# EAGLE board PCB_bun (EAGLE 9.7.0)
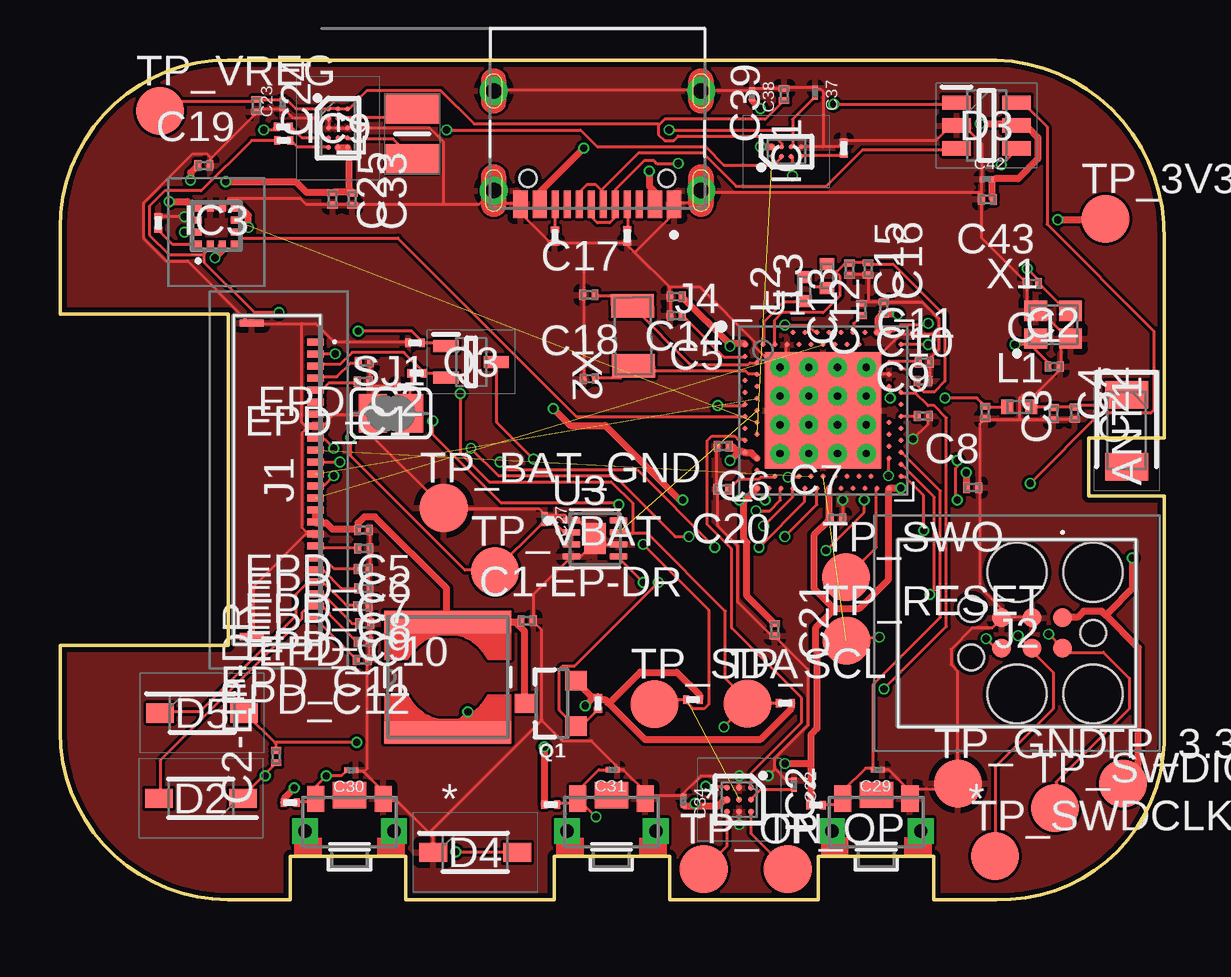
[diagram p0: board, top side]
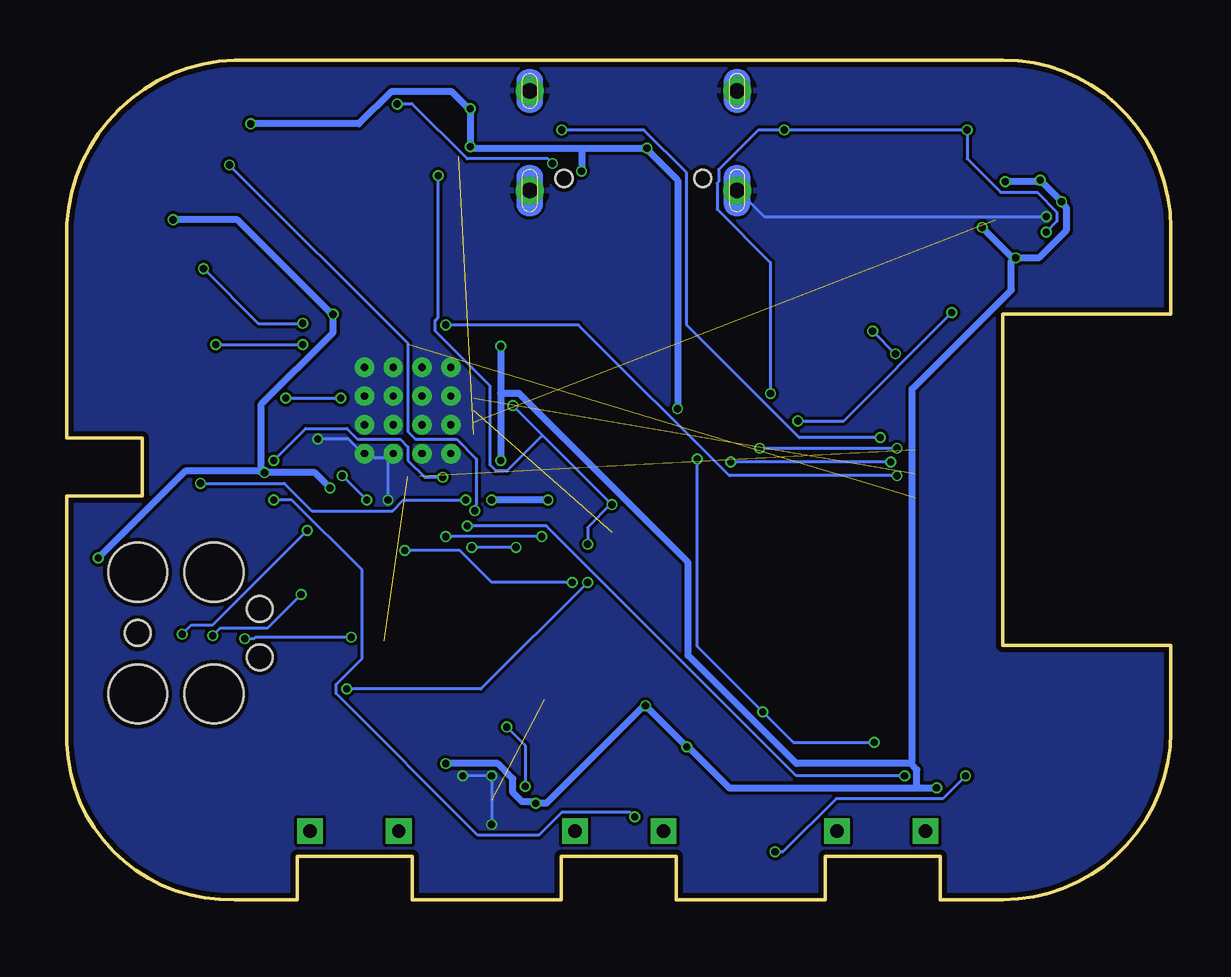
[diagram p1: board, bottom side, seen from below]

Size 46 x 35 mm. Coordinates in mm from the lower left corner, seen from the top.
Outline: 39,0 36.4,0 36.4,1.8 31.6,1.8 31.6,0 25.4,0 25.4,1.8 20.6,1.8 20.6,0 14.4,0 14.4,1.8 9.6,1.8 9.6,0 7,0 arc-90 0,7 0,10.6 7,10.6 7,24.4 0,24.4 0,28 arc-90 7,35 39,35 arc-90 46,27.5 46,19.25 42.86,19.25 42.86,16.82 46,16.82 46,6.5 arc-90 39,0
Copper layers (1*16): Top 0.035mm / dielectric 1.6mm / Bottom 0.035mm
Design rules "jlcpcb-2layers.dru": minimum track width 5mil, minimum drill 0.3mm, track to track 5mil, track to pad 5mil, pad to pad 5mil, via to via 5mil, smd to smd 5mil, copper to edge 0.2mm, drill to drill 6mil, minimum pad ring 10mil, minimum via ring 3mil, stop-mask expansion 4mil, vias tented up to drill 0mil, thermal gap 10mil
Net classes: 1 trasee_putere: width 0.3 mm

## Footprints (pad centres in the part's own frame; a part is rotated, then mirrored left to right if it is on the bottom)
2450AT18B100E_ANTC3216X140N = smd 1.15 x 1.8: 1 -1.5,0; 2 1.5,0
NORDIC_NRF_3_RESC0201_L = smd 0.28 x 0.43: 1 -0.255,0; 2 0.255,0
GRM011R60J152KE01L_2_CAPC0201X13N = smd 0.22 x 0.23: 1 -0.185,0; 2 0.185,0
ESP32_C6_LIBRARY_5_SOD3716X135N = smd 1.15 x 0.8: 1 -1.75,0; 2 1.75,0
ESP32_C6_LIBRARY_3_SOT95P280X145-6N = smd 1.2 x 0.6: 1 -1.25,0.95; 2 -1.25,0; 3 -1.25,-0.95; 4 1.25,-0.95; 5 1.25,0; 6 1.25,0.95
BQ25180YBGR_BGA8C40P2X4_100X155X50 = smd 0.2 x 0.2: A1 -0.2,0.6; A2 0.2,0.6; B1 -0.2,0.2; B2 0.2,0.2; C1 -0.2,-0.2; C2 0.2,-0.2; D1 -0.2,-0.6; D2 0.2,-0.6
DRV2605YZFR_BGA9C50P3X3_144X144X62 = smd 0.25 x 0.25: A1 -0.5,0.5; A2 0,0.5; A3 0.5,0.5; B1 -0.5,0; B2 0,0; B3 0.5,0; C1 -0.5,-0.5; C2 0,-0.5; C3 0.5,-0.5
BMA423_BMA423 = smd 0.3 x 0.35: 1 -0.75,-0.775; 2 -0.25,-0.775; 3 0.25,-0.775; 4 0.75,-0.775; 7 0.75,0.775; 8 0.25,0.775; 9 -0.25,0.775; 10 -0.75,0.775 | smd 0.35 x 0.3: 5 0.775,-0.25; 6 0.775,0.25; 11 -0.775,0.25; 12 -0.775,-0.25
RT6160AWSC_BGA15C40P3X5_140X230X60 = smd 0.216 x 0.216: A1 -0.4,0.8; A2 0,0.8; A3 0.4,0.8; B1 -0.4,0.4; B2 0,0.4; B3 0.4,0.4; C1 -0.4,0; C2 0,0; C3 0.4,0; D1 -0.4,-0.4; D2 0,-0.4; D3 0.4,-0.4; E1 -0.4,-0.8; E2 0,-0.8; E3 0.4,-0.8
503480-2400_5034802400 = smd 0.3 x 0.7: 1 -5.75,1.525; 2 -5.25,1.525; 3 -4.75,1.525; 4 -4.25,1.525; 5 -3.75,1.525; 6 -3.25,1.525; 7 -2.75,1.525; 8 -2.25,1.525; 9 -1.75,1.525; 10 -1.25,1.525; 11 -0.75,1.525; 12 -0.25,1.525; 13 0.25,1.525; 14 0.75,1.525; 15 1.25,1.525; 16 1.75,1.525; 17 2.25,1.525; 18 2.75,1.525; 19 3.25,1.525; 20 3.75,1.525; 21 4.25,1.525; 22 4.75,1.525; 23 5.25,1.525; 24 5.75,1.525 | smd 0.3 x 1: MP1 -6.54,-1.125; MP2 6.54,-1.125
TC2030-IDC_TC2030IDC = smd 0.783 x 0.783: 1 -0.953,-0.635; 2 -0.953,0.635; 3 0.317,-0.635; 4 0.317,0.635; 5 1.588,-0.635; 6 1.588,0.635 | hole 2.451: -2.223,-2.54; -2.223,2.54; 0.952,-2.54; 0.952,2.54 | hole 1.067: -2.223,0; 2.857,-1.016; 2.857,1.016
KH-TYPE-C-16P_KINGHELM_KH-TYPE-C-16P = smd 0.6 x 1.15: A1_B12 -3.2,4.725; A4_B9 -2.4,4.725; A9_B4 2.4,4.725; A12_B1 3.2,4.725 | smd 0.3 x 1.15: A5 -1.25,4.725; A6 -0.25,4.725; A7 0.25,4.725; A8 1.25,4.725; B5 1.75,4.725; B6 0.75,4.725; B7 -0.75,4.725; B8 -1.75,4.725 | drill 0.65 pad 1.05: SH1 -4.32,0; SH2 4.32,0; SH3 -4.32,4.15; SH4 4.32,4.15 | hole 0.7: -2.89,3.65; 2.89,3.65
NORDIC_NRF_2_RESC0402_L = smd 0.5 x 0.6: 1 -0.5,0; 2 0.5,0
ESP32_C6_LIBRARY_2_IND_4828-WE-TPC_WRE = smd 0.9 x 5.3: 1 -2.286,0; 2 2.286,0
MLP2016SR47MT0S1_INDC2016X100N = smd 1.2 x 2.2: 1 -1.028,0; 2 1.028,0
ESP32_C6_LIBRARY_4_ESP32_C6_LIBRARY_4_ESP32_C6_LIBRARY_4_ESP32_C6_LIBRARY_4_ESP32_WROVER_SPARKFUN-DISCRETESEMI_SOT23-3 = smd 0.8 x 0.9: 1 -0.95,-1; 2 0.95,-1; 3 0,1.1
ESP32_C6_LIBRARY_6_SOT65P210X110-3N = smd 1.05 x 0.5: 1 -1.05,0.65; 2 -1.05,-0.65; 3 1.05,0
CPF0201D7K68C1_0201 = smd 0.35 x 0.25: 1 0,0.275; 2 0,-0.275
ERA-1AEB3401C_0201 = smd 0.35 x 0.25: 1 0,0.275; 2 0,-0.275
ESP32_C6_LIBRARY_7_JUMPER_SJ = smd 1.168 x 1.6: 1 -0.762,0; 2 0.762,0
2025-10-22_07-23-44_LIBRARY_SW_EVP-AKE31A_PAN = smd 0.711 x 1.092: 1 -1.4,-0.972; 2 1.4,-0.972 | drill 0.559 pad 0.914 square: 3 -1.848,0.381; 4 1.848,0.381 | smd 1.397 x 1.092: 5 0,-1.124
HECTOR_WATCH_1_TP20R = smd 2 x 2: TP 0,0
NORDIC_NRF_4_AQFN50P700X700X85_HS-74N = smd 4.85 x 4.85: P$74 0,0 | drill 0.3 pad 0.6: P$75 -1.8,1.8; P$76 -0.6,1.8; P$77 0.6,1.8; P$78 1.8,1.8; P$79 -1.8,0.6; P$80 -0.6,0.6; P$81 0.6,0.6; P$82 1.8,0.6; P$83 -1.8,-0.6; P$84 -0.6,-0.6; P$85 0.6,-0.6; P$86 1.8,-0.6; P$87 -1.8,-1.8; P$88 -0.6,-1.8; P$89 0.6,-1.8; P$90 1.8,-1.8 | smd 0.2 x 0.2: P$A8 -1.25,3.25; P$A10 -0.75,3.25; P$A12 -0.25,3.25; P$A14 0.25,3.25; P$A16 0.75,3.25; P$A18 1.25,3.25; P$A20 1.75,3.25; P$A22 2.25,3.25; P$A23 2.75,3.25; P$AA24 3.25,-2.25; P$AB2 -2.75,-2.5; P$AC5 -2,-2.75; P$AC9 -1,-2.75; P$AC11 -0.5,-2.75; P$AC13 0,-2.75; P$AC15 0.5,-2.75; P$AC17 1,-2.75; P$AC19 1.5,-2.75; P$AC21 2,-2.75; P$AC24 3.25,-2.75; P$AD2 -2.75,-3.25; P$AD4 -2.25,-3.25; P$AD6 -1.75,-3.25; P$AD8 -1.25,-3.25; P$AD10 -0.75,-3.25; P$AD12 -0.25,-3.25; P$AD14 0.25,-3.25; P$AD16 0.75,-3.25; P$AD18 1.25,-3.25; P$AD20 1.75,-3.25; P$AD22 2.25,-3.25; P$AD23 2.75,-3.25; P$B1 -3.25,2.75; P$B3 -2.5,2.75; P$B5 -2,2.75; P$B7 -1.5,2.75; P$B9 -1,2.75; P$B11 -0.5,2.75; P$B13 0,2.75; P$B15 0.5,2.75; P$B17 1,2.75; P$B19 1.5,2.75; P$B24 3.25,2.75; P$C1 -3.25,2.25; P$D2 -2.75,2; P$D23 2.75,2; P$E24 3.25,1.75; P$F2 -2.75,1.5; P$F23 2.75,1.5; P$G1 -3.25,1.25; P$H2 -2.75,1; P$H23 2.75,1; P$J1 -3.25,0.75; P$J24 3.25,0.75; P$K2 -2.75,0.5; P$L1 -3.25,0.25; P$L24 3.25,0.25; P$M2 -2.75,0; P$N1 -3.25,-0.25; P$N24 3.25,-0.25; P$P2 -2.75,-0.5; P$P23 2.75,-0.5; P$R1 -3.25,-0.75; P$R24 3.25,-0.75; P$T2 -2.75,-1; P$T23 2.75,-1; P$U1 -3.25,-1.25; P$U24 3.25,-1.25; P$V23 2.75,-1.5; P$W1 -3.25,-1.75; P$W24 3.25,-1.75; P$Y2 -2.75,-2; P$Y23 2.75,-2
ESP32_C6_LIBRARY_SON50P200X200X80-9N = smd 0.76 x 0.27: 1 -0.985,0.75; 2 -0.985,0.25; 3 -0.985,-0.25; 4 -0.985,-0.75; 5 0.985,-0.75; 6 0.985,-0.25; 7 0.985,0.25; 8 0.985,0.75 | smd 0.9 x 1.3: 9 0,0
NORDIC_NRF_BT-XTAL_2016_N = smd 0.95 x 0.85: 1 -0.725,-0.575; 2 0.725,-0.575; 3 0.725,0.575; 4 -0.725,0.575
NORDIC_NRF_1_XTAL_3215_N = smd 1 x 1.8: 1 -1.25,0; 2 1.25,0

## Placement (x,y rotation side)
ANT1  2450AT18B100E  [2450AT18B100E_ANTC3216X140N]  44.44,19.55 270 top
C1  12pF  [NORDIC_NRF_3_RESC0201_L]  41.42,22.22 0 top
C1-EP-DR  10uF  [NORDIC_NRF_3_RESC0201_L]  19.46,11.62 0 top
C2  12pF  [NORDIC_NRF_3_RESC0201_L]  40.52,25.68 180 top
C2-EP-DR  4.7uF/25V  [NORDIC_NRF_3_RESC0201_L]  9.01,5.97 90 top
C3  1pF  [NORDIC_NRF_3_RESC0201_L]  38.55,20.31 270 top
C4  1pF  [NORDIC_NRF_3_RESC0201_L]  41.39,20.25 270 top
C5  100nF  [NORDIC_NRF_3_RESC0201_L]  25.67,24.35 180 top
C6  4.7µF  [NORDIC_NRF_3_RESC0201_L]  27.63,18.9 180 top
C7  100nF  [NORDIC_NRF_3_RESC0201_L]  32.36,15.88 0 top
C8  100nF  [NORDIC_NRF_3_RESC0201_L]  38.02,17.17 0 top
C9  820pF  [NORDIC_NRF_3_RESC0201_L]  35.98,20.16 0 top
C10  N.C.  [NORDIC_NRF_3_RESC0201_L]  35.96,21.61 0 top
C11  100pF  [NORDIC_NRF_3_RESC0201_L]  36.02,22.4 0 top
C12  100nF  [NORDIC_NRF_3_RESC0201_L]  34.32,24.66 90 top
C13  N.C.  [NORDIC_NRF_3_RESC0201_L]  33.4,24.6 90 top
C14  4.7µF  [NORDIC_NRF_3_RESC0201_L]  25.67,25.13 179.2 top
C15  1.0µF  [NORDIC_NRF_3_RESC0201_L]  32.9,26.27 270 top
C16  47nF  [NORDIC_NRF_3_RESC0201_L]  33.67,26.29 270 top
C17  12pF  [NORDIC_NRF_3_RESC0201_L]  22.04,25.21 0 top
C18  12pF  [NORDIC_NRF_3_RESC0201_L]  22.05,21.71 1.3 top
C19  100nF  [NORDIC_NRF_3_RESC0201_L]  6,30.6 0 top
C20  4.7µF  [NORDIC_NRF_3_RESC0201_L]  27.61,17.11 180 top
C21  4.7µF  [NORDIC_NRF_3_RESC0201_L]  29.78,11.25 270 top
C22  N.C.  [NORDIC_NRF_3_RESC0201_L]  42.28,20.28 270 top
C23  0.1uF  [GRM011R60J152KE01L_2_CAPC0201X13N]  9.27,33.16 90 top
C24  10uF  [NORDIC_NRF_3_RESC0201_L]  8.19,33.09 270 top
C25  22uF  [NORDIC_NRF_3_RESC0201_L]  11.36,29.2 270 top
C27  0.1uF  [GRM011R60J152KE01L_2_CAPC0201X13N]  20.2,15.87 270 top
C29  1uF  [GRM011R60J152KE01L_2_CAPC0201X13N]  34.08,5.42 180 top
C30  1uF  [GRM011R60J152KE01L_2_CAPC0201X13N]  12.14,5.4 180 top
C31  1uF  [GRM011R60J152KE01L_2_CAPC0201X13N]  23.02,5.42 180 top
C32  1uF  [GRM011R60J152KE01L_2_CAPC0201X13N]  30.59,4.79 270 top
C33  22uF  [NORDIC_NRF_3_RESC0201_L]  12.18,29.2 270 top
C34  0.1uF  [GRM011R60J152KE01L_2_CAPC0201X13N]  25.98,4.11 270 top
C37  1uF  [GRM011R60J152KE01L_2_CAPC0201X13N]  31.47,33.63 270 top
C38  1uF  [GRM011R60J152KE01L_2_CAPC0201X13N]  28.84,33.57 270 top
C39  10uF  [NORDIC_NRF_3_RESC0201_L]  30.17,33.56 90 top
C42  0.1uF  [GRM011R60J152KE01L_2_CAPC0201X13N]  38.62,30.03 0 top
C43  4.7uF  [NORDIC_NRF_3_RESC0201_L]  38.64,29.19 180 top
D2  MBR0530  [ESP32_C6_LIBRARY_5_SOD3716X135N]  5.87,4.22 180 top
D3  USBLC6-2SC6Y  [ESP32_C6_LIBRARY_3_SOT95P280X145-6N]  38.61,32.27 0 top
D4  MBR0530  [ESP32_C6_LIBRARY_5_SOD3716X135N]  17.3,1.97 0 top
D5  MBR0530  [ESP32_C6_LIBRARY_5_SOD3716X135N]  5.92,7.77 0 top
EPD_C1  1uF/50V  [NORDIC_NRF_3_RESC0201_L]  12.64,21.59 180 top
EPD_C2  1uF/50V  [NORDIC_NRF_3_RESC0201_L]  12.68,22.41 180 top
EPD_C5  0.1uF/50V  [NORDIC_NRF_3_RESC0201_L]  12.64,15.4 180 top
EPD_C6  1uF/50V  [NORDIC_NRF_3_RESC0201_L]  12.66,14.63 180 top
EPD_C7  1uF/50V  [NORDIC_NRF_3_RESC0201_L]  12.63,13.78 180 top
EPD_C8  1uF/50V  [NORDIC_NRF_3_RESC0201_L]  12.66,12.97 180 top
EPD_C9  1uF/50V  [NORDIC_NRF_3_RESC0201_L]  12.62,12.22 180 top
EPD_C10  1uF/50V  [NORDIC_NRF_3_RESC0201_L]  12.7,11.49 180 top
EPD_C11  1uF/50V  [NORDIC_NRF_3_RESC0201_L]  12.63,10.74 180 top
EPD_C12  1uF/50V  [NORDIC_NRF_3_RESC0201_L]  12.6,9.99 180 top
IC1  BQ25180YBGR  [BQ25180YBGR_BGA8C40P2X4_100X155X50]  30.27,31.17 90 top
IC2  DRV2605YZFR  [DRV2605YZFR_BGA9C50P3X3_144X144X62]  28.3,4.16 270 top
IC3  BMA421  [BMA423_BMA423]  6.51,28.08 0 top
IC9  RT6160AWSC  [RT6160AWSC_BGA15C40P3X5_140X230X60]  11.58,32.16 0 top
J1  503480-2400  [503480-2400_5034802400]  9.12,17.5 270 top
J2  TC2030-IDC  [TC2030-IDC_TC2030IDC]  40.82,11.11 180 top
J4  KH-TYPE-C-16P  [KH-TYPE-C-16P_KINGHELM_KH-TYPE-C-16P]  22.39,33.71 180 top
L1  3.9nH  [NORDIC_NRF_2_RESC0402_L]  39.98,20.53 0 top
L2  10µH  [NORDIC_NRF_2_RESC0402_L]  31.02,25.45 90 top
L3  15nH  [NORDIC_NRF_2_RESC0402_L]  31.96,26 90 top
L5  68uH  [ESP32_C6_LIBRARY_2_IND_4828-WE-TPC_WRE]  16.16,9.27 90 top
L7  FTC252012SR47MBCA  [MLP2016SR47MT0S1_INDC2016X100N]  14.67,31.91 270 top
Q1  20V/4.2A/52mΩ/1.4W  [ESP32_C6_LIBRARY_4_ESP32_C6_LIBRARY_4_ESP32_C6_LIBRARY_4_ESP32_C6_LIBRARY_4_ESP32_WROVER_SPARKFUN-DISCRETESEMI_SOT23-3]  20.5,8.18 90 top
Q3  SI1308EDL-T1-GE3  [ESP32_C6_LIBRARY_6_SOT65P210X110-3N]  17.13,22.41 0 top
R1  10k  [CPF0201D7K68C1_0201]  9.59,4.04 270 top
R1_EP_DR  0.47  [ERA-1AEB3401C_0201]  14.87,21.95 90 top
R1_USB  5K1  [CPF0201D7K68C1_0201]  23.64,27.67 180 top
R2  0  [CPF0201D7K68C1_0201]  9.32,31.64 90 top
R2_EP_DR  10k  [ERA-1AEB3401C_0201]  14.79,23.21 90 top
R2_USB  5K1  [ERA-1AEB3401C_0201]  20.62,27.66 0 top
R3  0  [CPF0201D7K68C1_0201]  4.1,28.21 0 top
R4  0  [CPF0201D7K68C1_0201]  9.3,32.21 90 top
R7  10k  [CPF0201D7K68C1_0201]  31.5,3.94 270 top
R8  10k  [CPF0201D7K68C1_0201]  20.44,3.96 270 top
R9  10k  [CPF0201D7K68C1_0201]  32.66,31.32 0 top
R17  3K3  [CPF0201D7K68C1_0201]  30.22,8.19 270 top
R18  3K3  [CPF0201D7K68C1_0201]  26.37,8.34 270 top
R_PWR_EPD  10k  [CPF0201D7K68C1_0201]  22.42,8.17 180 top
R_TYPE_SEL  2.2  [ERA-1AEB3401C_0201]  14.34,21.38 90 top
SJ1  [ESP32_C6_LIBRARY_7_JUMPER_SJ]  13.79,20.27 0 top
SW_DN  2025-10-22_07-23-44_LIBRARY_EVP-AKE31ASW_EVP-AKE31A_PAN  [2025-10-22_07-23-44_LIBRARY_SW_EVP-AKE31A_PAN]  34.02,3.24 180 top
SW_ENT  2025-10-22_07-23-44_LIBRARY_EVP-AKE31ASW_EVP-AKE31A_PAN  [2025-10-22_07-23-44_LIBRARY_SW_EVP-AKE31A_PAN]  22.98,3.23 180 top
SW_UP  2025-10-22_07-23-44_LIBRARY_EVP-AKE31ASW_EVP-AKE31A_PAN  [2025-10-22_07-23-44_LIBRARY_SW_EVP-AKE31A_PAN]  12.06,3.23 180 top
TP_3.3V  HECTOR_WATCH_1_TPTP20R  [HECTOR_WATCH_1_TP20R]  44.28,4.83 0 top
TP_3V3  HECTOR_WATCH_1_TPTP20R  [HECTOR_WATCH_1_TP20R]  43.55,28.38 0 top
TP_BAT_GND  HECTOR_WATCH_1_TPTP20R  [HECTOR_WATCH_1_TP20R]  15.99,16.32 0 top
TP_GND  HECTOR_WATCH_1_TPTP20R  [HECTOR_WATCH_1_TP20R]  37.41,4.84 0 top
TP_ON  HECTOR_WATCH_1_TPTP20R  [HECTOR_WATCH_1_TP20R]  26.82,1.28 0 top
TP_OP  HECTOR_WATCH_1_TPTP20R  [HECTOR_WATCH_1_TP20R]  30.32,1.28 0 top
TP_RESET  HECTOR_WATCH_1_TPTP20R  [HECTOR_WATCH_1_TP20R]  32.77,10.78 0 top
TP_SCL  HECTOR_WATCH_1_TPTP20R  [HECTOR_WATCH_1_TP20R]  28.65,8.16 0 top
TP_SDA  HECTOR_WATCH_1_TPTP20R  [HECTOR_WATCH_1_TP20R]  24.78,8.15 0 top
TP_SWDCLK  HECTOR_WATCH_1_TPTP20R  [HECTOR_WATCH_1_TP20R]  38.95,1.82 0 top
TP_SWDIO  HECTOR_WATCH_1_TPTP20R  [HECTOR_WATCH_1_TP20R]  41.46,3.82 0 top
TP_SWO  HECTOR_WATCH_1_TPTP20R  [HECTOR_WATCH_1_TP20R]  32.75,13.44 0 top
TP_VBAT  HECTOR_WATCH_1_TPTP20R  [HECTOR_WATCH_1_TP20R]  18.12,13.69 0 top
TP_VREG  HECTOR_WATCH_1_TPTP20R  [HECTOR_WATCH_1_TP20R]  4.17,32.88 0 top
U1  NRF52840_QF  [NORDIC_NRF_4_AQFN50P700X700X85_HS-74N]  31.8,20.39 0 top
U3  MAX17048G+T10  [ESP32_C6_LIBRARY_SON50P200X200X80-9N]  22.29,15.05 0 top
X1  32MHz  [NORDIC_NRF_BT-XTAL_2016_N]  41.38,23.96 0 top
X2  32.768kHz  [NORDIC_NRF_1_XTAL_3215_N]  23.87,23.49 90.9 top

## Library data of the parts
ANT1 = InkTime_v5; ARROW_PART_NUMBER: 2450AT18B100E; ARROW_PRICE-STOCK: https://www.arrow.com/en/products/2450at18b100e/johanson-dielectrics?utm_currency=USD&region=nac; DESCRIPTION: Antennas 2.45GHz ANTENNA; HEIGHT: 1.4mm; MANUFACTURER_NAME: JOHANSON TECHNOLOGY; MANUFACTURER_PART_NUMBER: 2450AT18B100E; MOUSER_PART_NUMBER: 609-2450AT18B100E; MOUSER_PRICE-STOCK: https://www.mouser.co.uk/ProductDetail/Johanson-Technology/2450AT18B100E?qs=yCnrNFeXz%252Bh5MFsFIXGZGA%3D%3D
C1 C1-EP-DR C2 C2-EP-DR C3-C22 C24 C25 C33 C39 C43 EPD_C1 EPD_C2 EPD_C5-EPD_C12 L1-L3 R1 R1_EP_DR R1_USB R2 R2_EP_DR R2_USB R3 R4 R7-R9 R17 R18 R_PWR_EPD R_TYPE_SEL SJ1 TP_3.3V TP_3V3 TP_BAT_GND TP_GND TP_ON TP_OP TP_RESET TP_SCL TP_SDA TP_SWDCLK TP_SWDIO TP_SWO TP_VBAT TP_VREG U1 X1 X2 = InkTime_v5
C23 C27 C29-C32 C34 C37 C38 C42 = InkTime_v5; AVAILABILITY: In Stock; CHECK_PRICES: https://www.snapeda.com/parts/GRM011R60J152KE01L/Murata/view-part/?ref=eda; DESCRIPTION: SMD Capacitor X5R(EIA) with Capacitance: 1500pF Tol. 10%. Rated Voltage: 6.3Vdc; MF: Murata; MP: GRM011R60J152KE01L; PACKAGE: 0201 Murata; PRICE: None; SNAPEDA_LINK: https://www.snapeda.com/parts/GRM011R60J152KE01L/Murata/view-part/?ref=snap
D2 D4 D5 = InkTime_v5; AVAILABILITY: In Stock; CHECK_PRICES: https://www.snapeda.com/parts/MBR0530/Onsemi/view-part/?ref=eda; DESCRIPTION: Diode Schottky 30 V 500mA Surface Mount SOD-123; MF: ON Semiconductor; MP: MBR0530; PACKAGE: SOD-123-2 ON Semiconductor; PRICE: None; PURCHASE-URL: https://www.snapeda.com/api/url_track_click_mouser/?unipart_id=179458&manufacturer=ON Semiconductor&part_name=MBR0530&search_term=None; SNAPEDA_LINK: https://www.snapeda.com/parts/MBR0530/Onsemi/view-part/?ref=snap
D3 = InkTime_v5; AVAILABILITY: In Stock; CHECK_PRICES: https://www.snapeda.com/parts/USBLC6-2SC6Y/STMicroelectronics/view-part/?ref=eda; DESCRIPTION: 17V Clamp 5A (8/20µs) Ipp Tvs Diode Surface Mount SOT-23-6; MF: STMicroelectronics; MP: USBLC6-2SC6Y; PACKAGE: SOT-23-6 STMicroelectronics; PRICE: None; SNAPEDA_LINK: https://www.snapeda.com/parts/USBLC6-2SC6Y/STMicroelectronics/view-part/?ref=snap
IC1 = InkTime_v5; ARROW_PART_NUMBER: BQ25180YBGR; ARROW_PRICE-STOCK: https://www.arrow.com/en/products/bq25180ybgr/texas-instruments?utm_currency=USD&region=nac; DESCRIPTION: Charger IC Lithium Ion/Polymer, Lithium Iron Phosphate 8-DSBGA (1.6x1.1); HEIGHT: 0.5mm; MANUFACTURER_NAME: Texas Instruments; MANUFACTURER_PART_NUMBER: BQ25180YBGR; MOUSER_PART_NUMBER: 595-BQ25180YBGR; MOUSER_PRICE-STOCK: https://www.mouser.co.uk/ProductDetail/Texas-Instruments/BQ25180YBGR?qs=doiCPypUmgEWjAK%252BJAX6Tw%3D%3D
IC2 = InkTime_v5; ARROW_PART_NUMBER: DRV2605YZFR; ARROW_PRICE-STOCK: https://www.arrow.com/en/products/drv2605yzfr/texas-instruments?region=nac; DESCRIPTION: Haptic Driver for ERM/LRA with Built-In Library and Smart Loop Architecture; HEIGHT: 0.625mm; MANUFACTURER_NAME: Texas Instruments; MANUFACTURER_PART_NUMBER: DRV2605YZFR
IC3 = InkTime_v5; ARROW_PART_NUMBER: BMA423; ARROW_PRICE-STOCK: https://www.arrow.com/en/products/bma423/bosch; DESCRIPTION: Accelerometers Triaxial low-g 12bit Acceleration Sensor; HEIGHT: 1mm; MANUFACTURER_NAME: BOSCH; MANUFACTURER_PART_NUMBER: BMA423; MOUSER_PART_NUMBER: 262-BMA423; MOUSER_PRICE-STOCK: https://www.mouser.co.uk/ProductDetail/Bosch-Sensortec/BMA423?qs=HXFqYaX1Q2xC%252BSgeGoX3mg%3D%3D
IC9 = InkTime_v5; DESCRIPTION: Buck-Boost Regulator Positive Output Step-Up/Step-Down I2C DC-DC Controller IC 15-WL-CSP (BSC) (1.4x2.3); HEIGHT: 0.6mm; MANUFACTURER_NAME: RICHTEK; MANUFACTURER_PART_NUMBER: RT6160AWSC; MOUSER_PART_NUMBER: 835-RT6160AWSC; MOUSER_PRICE-STOCK: https://www.mouser.co.uk/ProductDetail/Richtek/RT6160AWSC?qs=amGC7iS6iy%2FLd9PSoixZXQ%3D%3D
J1 = InkTime_v5; DESCRIPTION: FFC & FPC Connectors 0.5mm FPC RA SMT Dual Contact 24Ckt; HEIGHT: 1.87mm; MANUFACTURER_NAME: Molex; MANUFACTURER_PART_NUMBER: 503480-2400; MOUSER_PART_NUMBER: 538-503480-2400; MOUSER_PRICE-STOCK: https://www.mouser.co.uk/ProductDetail/Molex/503480-2400?qs=OAhjpuo3Vu7efIoxFh9AOw%3D%3D
J2 = InkTime_v5; DESCRIPTION: CABLE ADAPTER 6 POS; HEIGHT: 19mm; MANUFACTURER_NAME: Tag Connect; MANUFACTURER_PART_NUMBER: TC2030-IDC
J4 = InkTime_v5; AVAILABILITY: Not in stock; CHECK_PRICES: https://www.snapeda.com/parts/KH-TYPE-C-16P/Kinghelm/view-part/?ref=eda; MF: kinghelm; MP: KH-TYPE-C-16P; PACKAGE: None; PRICE: None; SNAPEDA_LINK: https://www.snapeda.com/parts/KH-TYPE-C-16P/Kinghelm/view-part/?ref=snap
L5 = InkTime_v5; COPYRIGHT: Copyright (C) 2024 Ultra Librarian. All rights reserved.; MANUFACTURER_PART_NUMBER: 744043680; MFR_NAME: Wurth Electronics
L7 = InkTime_v5; DESCRIPTION: SMD / SMT Inductors (Coils), L=0.47?H, L x W x T :; HEIGHT: 1mm; JLCPCB: https://jlcpcb.com/partdetail/6763488-FTC252012SR47MBCA/C5832368; MANUFACTURER_NAME: TDK; MANUFACTURER_PART_NUMBER: FTC252012SR47MBCA
Q1 = InkTime_v5; PROD_ID: TRAN-14388
Q3 = InkTime_v5; AVAILABILITY: In Stock; CHECK_PRICES: https://www.snapeda.com/parts/SI1308EDL-T1-GE3/Vishay+Siliconix/view-part/?ref=eda; DESCRIPTION: Si1308EDL-T1-GE3 N-channel MOSFET Transistor, 1.5 A, 30 V, 3-Pin SC-70 | Siliconix / Vishay SI1308EDL-T1-GE3; MF: Vishay Siliconix; MP: SI1308EDL-T1-GE3; PACKAGE: SOT-323 Vishay Semiconductor; PRICE: None; PURCHASE-URL: https://www.snapeda.com/api/url_track_click_mouser/?unipart_id=274603&manufacturer=Vishay Siliconix&part_name=SI1308EDL-T1-GE3&search_term=None; SNAPEDA_LINK: https://www.snapeda.com/parts/SI1308EDL-T1-GE3/Vishay+Siliconix/view-part/?ref=snap
SW_DN SW_ENT SW_UP = InkTime_v5; COPYRIGHT: Copyright (C) 2025 Ultra Librarian. All rights reserved.; DIGI-KEY_PART_NUMBER_1: P123437TR-ND; DIGI-KEY_PART_NUMBER_2: P123437CT-ND; DIGI-KEY_PART_NUMBER_3: P123437DKR-ND; MANUFACTURER_NAME: Panasonic; MANUFACTURER_PART_NUMBER: EVP-AKE31A
U3 = InkTime_v5; AVAILABILITY: In Stock; CHECK_PRICES: https://www.snapeda.com/parts/MAX17048G+T10/Analog+Devices/view-part/?ref=eda; DESCRIPTION: 3µA 1-Cell/2-Cell Fuel Gauge with ModelGauge; MF: Analog Devices; MP: MAX17048G+T10; PACKAGE: TDFN-8 Maxim; PRICE: None; PURCHASE-URL: https://www.snapeda.com/api/url_track_click_mouser/?unipart_id=329239&manufacturer=Analog Devices&part_name=MAX17048G+T10&search_term=None; SNAPEDA_LINK: https://www.snapeda.com/parts/MAX17048G+T10/Analog+Devices/view-part/?ref=snap

## Nets
3V3 [trasee_putere]: C6.1 C7.1 C8.1 C12.1 C14.1 C19.1 C25.1 C33.1 C34.2 IC2.C2 IC3.3 IC3.7 IC3.10 IC9.E2 IC9.E3 J2.1 Q1.2 R1.2 R7.2 R8.2 R17.1 R18.1 R_PWR_EPD.2 TP_3.3V.TP TP_3V3.TP U1.P$A22 U1.P$AD14 U1.P$AD23 U1.P$B1 U1.P$W1 U1.P$Y2
ALERT: U1.P$J24 U3.5
D+: D3.4 U1.P$AD6
D-: D3.6 U1.P$AD4
DEC1: C5.1 U1.P$C1
DEC3: C11.1 U1.P$D23
DEC4_6: C10.1 C15.1 C16.1 L3.2 U1.P$B5 U1.P$E24
DN: D3.1 J4.A7 J4.B7
DP: D3.3 J4.A6 J4.B6
EPD_3V3 [trasee_putere]: C1-EP-DR.1 EPD_C5.2 J1.15 J1.16 L5.2 Q1.3
EPD_BUSY: J1.9 U1.P$AD12
EPD_CS: J1.12 U1.P$K2
EPD_DC: J1.11 U1.P$AD10
EPD_RST: J1.10 U1.P$AC11
GDR: J1.2 Q3.1 R2_EP_DR.2
GND: C1-EP-DR.2 C1.2 C2.2 C3.2 C4.2 C5.2 C6.2 C7.2 C8.2 C9.2 C10.2 C11.2 C12.2 C13.2 C14.2 C15.2 C16.2 C17.1 C18.1 C19.2 C20.2 C21.2 C22.2 C23.1 C24.2 C25.2 C27.1 C29.1 C30.1 C31.1 C32.1 C33.2 C34.1 C37.1 C38.1 C39.2 C42.1 C43.2 D3.2 D4.1 EPD_C1.1 EPD_C2.1 EPD_C5.1 EPD_C6.1 EPD_C7.1 EPD_C8.1 EPD_C9.1 EPD_C10.1 EPD_C11.1 EPD_C12.1 IC1.D2 IC2.B1 IC2.B3 IC3.8 IC3.9 IC9.B1 IC9.C1 IC9.C2 IC9.C3 J1.8 J1.17 J1.MP1 J1.MP2 J2.3 J2.5 J4.A1_B12 J4.A12_B1 J4.SH1 J4.SH2 J4.SH3 J4.SH4 R1_USB.1 R2_EP_DR.1 R2_USB.2 R3.1 R9.1 R_TYPE_SEL.1 SJ1.1 SW_DN.1 SW_ENT.1 SW_UP.1 TP_BAT_GND.TP TP_GND.TP U1.P$74 U1.P$75 U1.P$76 U1.P$77 U1.P$78 U1.P$79 U1.P$80 U1.P$81 U1.P$82 U1.P$83 U1.P$84 U1.P$85 U1.P$86 U1.P$87 U1.P$88 U1.P$89 U1.P$90 U1.P$B7 U1.P$F23 U3.1 U3.4 U3.6 U3.9 X1.2 X1.4
HAPTIC_EN: IC2.A1 U1.P$U1
IMU_INT1: IC3.5 U1.P$N1
IMU_INT2: IC3.6 U1.P$P2
LX1: IC9.B2 IC9.B3 L7.1
LX2: IC9.D2 IC9.D3 L7.2
MOSI: J1.14 U1.P$B13
N$1: IC1.D1 R9.2
N$2: IC3.1 R3.2
N$3: C13.1 U1.P$A18
N$4: IC9.D1 R4.2
N$5: IC9.E1 R2.2
N$6: C9.1 U1.P$N24
N$7: C20.1 U1.P$AC5
N$8: L2.2 L3.1
N$9: L2.1 U1.P$B3
N$10: C3.1 L1.1 U1.P$H23
N$11: C1.1 U1.P$B24 X1.1
N$12: C2.1 U1.P$A23 X1.3
N$14: C32.2 IC2.A2
N$15: EPD_C2.2 J1.4
N$16: C2-EP-DR.2 D5.2 L5.1 Q3.3
N$17: C2-EP-DR.1 D2.1 D4.2
N$18: R1_EP_DR.1 R_TYPE_SEL.2 SJ1.2
N$19: EPD_C1.2 J1.5
N$20: J4.B5 R2_USB.1
N$21: EPD_C6.2 J1.18
N$22: EPD_C7.2 J1.19
N$23: EPD_C8.2 J1.20
N$25: EPD_C10.2 J1.22
N$26: J4.A5 R1_USB.2
N$27: EPD_C12.2 J1.24
OUT+: IC2.A3 TP_OP.TP
OUT-: IC2.C3 TP_ON.TP
P0.00/XL1: C17.2 U1.P$D2 X2.2
P0.01/XL2: C18.2 U1.P$F2 X2.1
P0.04: U1.P$J1
P0.09: U1.P$L24
P0.13: C30.2 R1.1 SW_UP.2 U1.P$AD8
P0.14: C31.2 R8.1 SW_ENT.2 U1.P$AC9
P0.19: U1.P$AC15
P0.20: U1.P$AD16
P0.21: U1.P$AC17
P0.22: U1.P$AD18
P0.23: U1.P$AC19
P0.24: U1.P$AD20
P0.25: U1.P$AC21
P0.26: U1.P$G1
P0.27: U1.P$H2
P0.28: U1.P$B11
P0.29: U1.P$A10
P0.30: U1.P$B9
P0.31: U1.P$A8
P1.01: Q1.1 R_PWR_EPD.1 U1.P$Y23
P1.02: C29.2 R7.1 SW_DN.2 U1.P$W24
P1.03: U1.P$V23
P1.04: U1.P$U24
P1.05: U1.P$T23
P1.06: U1.P$R24
P1.07: U1.P$P23
P1.09: U1.P$R1
P1.10: U1.P$A20
P1.11: U1.P$B19
P1.12: U1.P$B17
P1.13: U1.P$A16
P1.14: U1.P$B15
P1.15: U1.P$A14
PMIC_INT: IC1.A1 U1.P$T2
PREVGH: D5.1 EPD_C9.2 J1.21
PREVGL: D2.2 EPD_C11.2 J1.23
RESE: J1.3 Q3.2 R1_EP_DR.2
RESET: J2.6 TP_RESET.TP U1.P$AC13
RF: ANT1.1 C4.1 C22.1 L1.2
SCK: J1.13 U1.P$A12
SCL: IC1.B1 IC2.C1 IC3.12 R4.1 R17.2 TP_SCL.TP U1.P$M2 U3.7
SDA: IC1.C1 IC2.B2 IC3.2 R2.1 R18.2 TP_SDA.TP U1.P$L1 U3.8
SWDCLK: J2.4 TP_SWDCLK.TP U1.P$AA24
SWDIO: J2.2 TP_SWDIO.TP U1.P$AC24
SWO: TP_SWO.TP U1.P$AD22
VBAT: C27.2 C37.2 IC1.C2 TP_VBAT.TP U3.2 U3.3
VBUS [trasee_putere]: C21.1 C38.2 C42.2 C43.1 D3.5 IC1.A2 J4.A4_B9 J4.A9_B4 U1.P$AD2
VREG: C23.2 C24.1 C39.1 IC1.B2 IC9.A1 IC9.A2 IC9.A3 TP_VREG.TP

## Tracks (layer width: path | path; a pad name or v marks a point on that pad's centre or on a via)
3V3  (via drill 0.3)
  Top 0.3: 43.57,11.86 44.94,10.49 44.94,5.48 44.3,4.84 TP_3.3V.TP | 43.57,11.86 43.41,12.02 42.65,12.02 42.4,11.76 41.83,11.76 J2.1 | U1.P$A22 34.08,23.7 34.08,24.21 34.27,24.4 C12.1 34.46,24.4 v34.9,24.4 | U1.P$AD14 32.05,17.1 32.05,15.89 C7.1 31.98,15.76 31.41,15.19 31.41,12.97 32.24,12.14 | 34.52,17.1 34.52,13.35 33.32,12.14 32.24,12.14 | 34.52,17.1 U1.P$AD23 | 31.28,5.67 31.28,6.87 31.54,7.13 31.54,10.37 31.47,10.43 31.47,11.32 32.17,12.02 32.24,12.14 | 31.28,5.67 31.28,3.95 R7.2 | v37.76,17.8 37.76,17.22 C8.1 | v35.03,17.16 34.65,17.16 34.52,17.1 | v41.57,28.34 43.54,28.34 TP_3V3.TP | v44.68,14.24 44.68,12.97 43.67,11.95 43.57,11.86 | 11.98,31.32 11.6,31.32 IC9.E2 | 11.98,31.32 IC9.E3 | 11.98,31.32 12.04,31.19 12.04,29.61 12.17,29.48 C33.1 11.98,29.48 11.41,29.48 C25.1 11.22,29.48 10.27,29.48 9.82,29.92 v6.9,29.92 | v4.55,29.1 5.31,29.1 5.5,28.91 5.76,28.91 IC3.10 | v5.44,29.99 5.44,30.3 5.69,30.56 C19.1 | v6.46,26.75 6.71,27 6.71,27.26 IC3.3 | v7.85,28.02 7.85,28.53 7.54,28.84 7.28,28.84 IC3.7 | 28.55,18.62 28.81,18.62 29,18.43 U1.P$Y2 | 28.55,18.62 U1.P$W1 | 28.24,18.68 28.05,18.88 27.92,18.88 C6.1 | 28.24,18.68 28.43,18.68 28.55,18.62 | 27.92,23.19 27.86,23.19 25.95,25.1 C14.1 | 27.92,23.19 28.49,23.19 U1.P$B1 | v27.92,18.3 28.17,18.56 28.24,18.68 | v27.92,23.07 27.92,23.19 | 26.46,3.89 27.41,3.89 27.66,4.14 27.79,4.14 IC2.C2 | 26.46,3.89 26.01,3.89 C34.2 | v20.17,6.37 20.17,4.02 R8.2 | 22.2,8.4 v21.89,8.08 | 22.2,8.4 22.39,8.4 R_PWR_EPD.2 22.52,8.33 22.71,8.33 22.87,8.17 | v9.76,4.65 9.38,4.27 9.38,4.08 R1.2 | 22.87,8.17 24.36,6.68 29.19,6.68 30.46,7.95 30.46,8.14 R17.1 | R18.1 26.65,8.4 26.65,8.52 25.7,9.48 24.17,9.48 22.97,8.27 22.87,8.17
  Top 0.3: Q1.2 21.5,9.1 22.14,8.46 22.2,8.4 | v26.46,4.02 26.46,3.89 | v30.2,5.67 31.16,5.67 31.28,5.67
  Bottom 0.3: v35.03,17.16 35.67,17.8 v37.76,17.8 37.89,17.86 | 37.89,17.86 37.89,20.65 34.9,23.64 v34.9,24.4 35.03,24.46 38.9,28.34 v41.57,28.34 | v44.68,14.24 41.06,17.86 38.02,17.86 37.89,17.86 | v6.46,26.75 5.5,26.75 4.36,27.89 4.36,28.84 4.49,28.97 v4.55,29.1 v5.44,29.99 5.57,29.92 v6.9,29.92 | v7.85,28.02 6.58,26.75 v6.46,26.75 | v27.92,23.07 27.92,21.1 | 27.92,21.1 v27.92,18.3 | 10.58,4.65 18.39,4.65 20.04,6.3 v20.17,6.37 v21.89,8.08 22.01,8.02 26.01,4.02 v26.46,4.02 26.59,4.08 27.03,4.08 27.41,4.46 27.41,5.03 28.05,5.67 v30.2,5.67 | 10.58,4.65 v9.76,4.65 | 10.84,5.67 15.6,5.67 20.11,10.17 20.11,14.05 27.16,21.1 27.79,21.1 27.92,21.1 | 10.84,5.67 10.58,5.41 10.58,4.78 10.58,4.65 | v6.46,26.75 6.65,26.62 6.65,25.42 10.77,21.29 10.77,5.79 10.84,5.67
ALERT  (via drill 0.3)
  Top 0.127: v34.33,8.78 36.94,11.38 36.94,20.08 36.43,20.59 36.17,20.59 35.67,21.1 35.09,21.1 U1.P$J24 | v24.3,13.22 23.28,14.24 U3.5
  Bottom 0.127: v34.33,8.78 28.74,8.78 v24.3,13.22
D+  (via drill 0.3)
  Top 0.127: v29,16.21 29.57,16.21 30.01,16.65 30.01,17.1 U1.P$AD6 | v39.22,30.62 39.86,31.26 D3.4
  Bottom 0.127: v29,16.21 29,16.4 28.93,16.46 28.93,18.37 29.76,19.19 31.47,19.19 31.79,19.51 31.79,23.19 v39.22,30.62
D-  (via drill 0.3)
  Top 0.127: v29.38,16.65 29.51,16.78 29.51,17.1 U1.P$AD4 | v40.43,17.35 43.35,20.27 45.45,20.27 45.57,20.4 45.57,23.7 41.13,28.15 41.13,32.21 40.17,33.16 39.92,33.16 D3.6
  Bottom 0.127: v29.38,16.65 31.98,16.65 32.43,16.21 35.79,16.21 36.94,17.35 v40.43,17.35
DEC1
  Top 0.127: U1.P$C1 28.49,22.62 27.66,22.62 25.95,24.34 C5.1
DEC3
  Top 0.127: U1.P$D23 34.59,22.43 35.73,22.43 C11.1
DEC4_6
  Top 0.127: U1.P$E24 35.09,22.11 35.22,22.11 35.67,21.67 C10.1 35.73,21.6 35.73,21.41 35.98,21.16 36.43,21.16 36.87,21.6 36.87,24.34 34.71,26.49 33.7,26.49 C16.1 33.63,26.56 32.94,26.56 C15.1 32.87,26.49 32.68,26.49 32.36,26.18 32.33,26.15 | 32.33,26.15 31.98,26.49 L3.2 | 32.33,26.15 32.49,25.99 32.49,25.16 31.79,24.46 30.08,24.46 29.76,24.15 29.76,23.19 U1.P$B5
DN  (via drill 0.3)
  Top 0.127: J4.A7 22.2,28.97 22.2,28.4 22.39,28.21 22.9,28.21 23.09,28.4 23.09,28.97 J4.B7 23.16,29.03 23.16,29.61 24.36,30.81 24.74,30.81 24.87,30.69 v25.76,30.69 | v32.24,33.16 37.32,33.16 D3.1
  Bottom 0.127: v32.24,33.16 31.6,33.16 29.32,30.88 25.95,30.88 v25.76,30.69
DP
  Top 0.127: 22.55,29.58 22.59,29.54 22.59,29.03 J4.A6 | 22.55,29.58 22.33,29.8 21.95,29.8 21.7,29.54 21.7,29.03 J4.B6 | D3.3 37.32,31.26 33.44,31.26 31.92,29.73 28.17,29.73 26.78,31.13 24.11,31.13 22.59,29.61 22.55,29.58
EPD_3V3
  Top 0.3: J1.15 10.65,16.21 10.65,15.89 J1.16 10.65,15.7 11.09,15.7 11.35,15.45 12.36,15.45 EPD_C5.2 12.42,15.57 12.42,15.7 12.68,15.95 13.12,15.95 16.11,12.97 16.11,11.7 L5.2 16.17,11.57 19.16,11.57 C1-EP-DR.1 19.09,11.45 19.35,11.19 19.35,8.21 Q1.3
EPD_BUSY  (via drill 0.3)
  Top 0.127: v30.2,15.13 31.54,16.46 31.54,17.1 U1.P$AD12 | v26.2,15.13 25.63,15.13 23.09,17.67 18.27,17.67 v17.12,18.81 | v11.41,18.81 11.03,19.19 10.65,19.19 J1.9
  Bottom 0.127: v26.2,15.13 v30.2,15.13 | v11.41,18.81 v17.12,18.81
EPD_CS  (1 unrouted)
EPD_DC  (via drill 0.3)
  Top 0.127: v29.12,14.68 31.03,16.59 31.03,17.1 U1.P$AD10 | v27.28,14.68 24.05,17.92 18.65,17.92 v18.33,18.24 | v11.66,18.24 J1.11
  Bottom 0.127: v27.28,14.68 v29.12,14.68 | v11.66,18.24 v18.33,18.24
EPD_RST  (1 unrouted)
GDR  (via drill 0.3)
  Top 0.127: Q3.1 16.04,23.07 15.92,23.19 15.09,23.19 R2_EP_DR.2 15.09,23.26 14.65,23.7 v12.42,23.7 | v11.47,22.75 J1.2
  Bottom 0.127: v12.42,23.7 v11.47,22.75
GND  (via drill 0.3)
  Top 0.127: 31.79,31.38 32.43,31.38 32.62,31.58 R9.1 32.68,31.64 36.49,31.64 37.06,32.21 37.32,32.21 D3.2 37.38,32.21 37.7,32.21 38.4,31.51 38.4,30.05 C42.1 38.4,29.99 38.4,29.48 | 31.79,31.38 30.9,31.38 IC1.D2 | 31.79,31.38 31.79,33.67 31.66,33.8 31.47,33.8 C37.1 31.41,33.86 30.2,33.86 C39.2 30.14,33.8 28.87,33.8 C38.1 28.81,33.73 26.71,33.73 J4.SH1 26.65,33.73 18.08,33.73 J4.SH2 | 38.4,29.48 38.4,29.23 C43.2 38.4,29.16 38.4,27.58 40.24,25.73 C2.2 40.3,25.67 40.3,24.91 40.62,24.59 X1.4 40.68,24.53 40.87,24.53 42.02,23.38 X1.2 42.08,23.38 41.7,23 41.7,22.24 C1.2 41.63,22.18 41.63,22.05 40.62,21.03 40.11,21.03 39.98,20.91 39.98,20.02 | C29.1 34.52,5.41 35.41,4.52 35.41,4.27 SW_DN.1 35.41,4.59 37.19,4.59 37.38,4.78 TP_GND.TP 37.38,4.84 37.38,9.54 37.13,9.79 37.13,10.43 38.02,11.32 38.84,11.32 39.22,11.7 J2.5 | J2.5 39.28,11.76 40.49,11.76 J2.3 | C22.2 41.44,20.02 C4.2 41.38,20.02 39.98,20.02 | 39.98,20.02 38.59,20.02 C3.2 38.52,20.02 38.33,19.83 38.33,17.22 C8.2 38.33,17.16 38.33,13.03 39.28,12.08 39.28,11.83 J2.5 | 10.08,24.02 8.04,24.02 J1.MP1 7.98,24.08 7.85,24.08 5.31,26.62 4.42,26.62 3.47,27.58 3.47,29.03 5.5,31.07 6.14,31.07 6.27,30.94 6.3,30.91 | 10.08,24.02 10.65,24.02 11.41,23.26 14.46,23.26 R2_EP_DR.1 | 13.06,21.41 14.01,21.41 R_TYPE_SEL.1 | 13.06,21.41 12.93,21.54 EPD_C1.1 12.93,21.6 12.93,22.37 EPD_C2.1 | 13.06,21.41 13.06,20.27 SJ1.1 | 10.3,15.29 10.08,15.51 10.08,19.45 10.3,19.67 | 10.3,15.29 10.33,15.26 10.58,15.26 J1.17 | 10.3,19.67 10.33,19.7 10.58,19.7 J1.8 10.65,19.76 10.96,19.76 11.41,20.21 13,20.21 SJ1.1 | J1.MP2 8.04,11 8.04,13.03 10.27,15.26 10.3,15.29
  Top 0.127: 10.08,24.02 10.08,19.89 10.27,19.7 10.3,19.67 | EPD_C5.1 12.93,15.38 12.93,14.68 EPD_C6.1 12.93,14.62 12.93,13.8 EPD_C7.1 12.87,13.73 12.87,12.97 EPD_C8.1 12.93,12.91 12.93,12.27 EPD_C9.1 12.93,12.21 12.93,11.51 EPD_C10.1 12.93,11.45 12.93,10.75 EPD_C11.1 12.87,10.68 12.87,10.05 EPD_C12.1 12.81,9.98 12.81,5.48 12.68,5.35 12.65,5.32 | 12.65,5.32 13.44,4.52 13.44,4.21 SW_UP.1 13.5,4.14 14.01,4.14 15.38,2.78 | 12.65,5.32 12.62,5.35 12.36,5.35 C30.1 | 15.38,2.78 15.54,2.62 15.54,1.98 D4.1 | C6.2 27.35,18.88 27.35,17.16 C20.2 27.41,17.1 27.41,15.57 28.24,14.75 28.24,12.4 29.63,11 29.76,11 C21.2 29.82,10.94 31.16,9.6 31.16,7.26 29.76,5.86 29.76,5.48 29.79,5.45 | 29.79,5.45 30.2,5.03 30.59,5.03 C32.1 | v28.3,3.13 28.3,3.63 IC2.B3 | IC2.B1 28.3,4.72 v28.3,5.16 26.71,5.16 25.95,4.4 C34.1 25.95,4.33 24.55,4.33 | 24.55,4.33 24.43,4.21 SW_ENT.1 24.55,4.33 | 24.55,4.33 23.47,5.41 C31.1 23.16,5.48 23.16,5.6 22.14,6.62 20.93,6.62 20.08,7.48 | U3.6 23.22,14.81 22.52,14.81 22.33,15 U3.9 | U3.9 22.33,15.06 21.63,15.76 21.31,15.76 U3.1 21.25,15.83 21.06,16.02 20.23,16.02 C27.1 20.17,16.08 19.98,16.27 16.04,16.27 TP_BAT_GND.TP 15.98,16.34 13,19.32 13,20.15 SJ1.1 | U3.9 22.33,14.94 21.7,14.3 U3.4 21.25,14.24 19.73,12.72 C1-EP-DR.2 19.73,11.57 20.04,11.26 20.04,7.51 20.08,7.48 | v29.51,5.16 29.76,5.41 29.79,5.45 | 15.38,2.78 15.41,2.81 20.04,7.45 20.08,7.48 | v32.62,16.65 C7.2 | v35.54,19.19 36.17,19.83 36.17,20.15 C9.2 | C10.2 36.24,21.67 36.24,22.37 C11.2 36.3,22.43 36.3,22.62 36.62,22.94 36.62,23.57 | C15.2 32.94,26.05 33.63,26.05 C16.2 33.7,25.99 33.7,24.91
  Top 0.127: 33.7,24.91 34.27,24.91 C12.2 34.33,24.91 35.92,24.91 36.62,24.21 36.62,23.57 | 33.7,24.91 33.44,24.91 C13.2 | U1.P$F23 34.52,21.92 33.89,21.92 33.63,22.18 U1.P$74 | 30.01,22.24 30.27,22.49 30.27,23.13 U1.P$B7 | 30.01,22.24 U1.P$74 | U1.P$74 30.01,19.76 30.01,18.62 U1.P$87 30.08,18.62 31.16,18.62 U1.P$88 | U1.P$83 30.01,19.83 U1.P$74 | U1.P$79 30.01,21.03 30.59,21.6 U1.P$74 | U1.P$84 31.22,19.83 31.22,20.15 U1.P$74 | U1.P$80 31.22,21.03 U1.P$74 | U1.P$74 31.86,20.34 32.36,19.83 U1.P$85 32.43,19.76 32.43,18.62 U1.P$89 | U1.P$81 32.43,21.03 U1.P$74 | U1.P$86 33.63,19.83 33.63,20.97 U1.P$74 | U1.P$82 33.63,21.03 U1.P$74 | 30.01,22.24 U1.P$75 29.95,22.24 29.76,22.24 28.93,23.07 28.93,23.26 26.65,25.54 25.38,25.54 | 30.01,22.24 U1.P$74 | U1.P$76 31.16,22.18 30.65,21.67 U1.P$74 | U1.P$77 32.43,22.18 33,21.6 U1.P$74 | U1.P$74 33.63,22.24 U1.P$78 33.7,22.24 35.03,23.57 36.62,23.57 | C5.2 25.44,24.4 25.44,25.1 C14.2 25.38,25.16 25.38,25.54 | 21.82,27.38 20.68,27.38 R2_USB.2 20.62,27.45 20.36,27.45 19.22,28.59 19.22,28.97 J4.A12_B1 19.16,29.03 18.58,29.03 18.08,29.54 J4.SH4 18.01,29.54 17.44,28.97 15.98,28.97 | 21.82,27.38 23.6,27.38 R1_USB.1 23.6,27.32 23.95,26.97 | 21.82,27.38 21.82,25.23 C17.1 21.82,25.16 21.82,21.73 C18.1 | 23.95,26.97 25.38,25.54 | 23.95,26.97 23.98,27 25.57,28.59 25.57,28.97 J4.A1_B12 25.63,29.03 26.14,29.03 26.65,29.54 J4.SH3 26.65,29.48 38.4,29.48 | 6.3,30.91 8.17,32.78 C24.2 8.23,32.84 8.36,32.97 9.25,32.97 C23.1 9.31,32.97 9.7,32.59 11.15,32.59 IC9.B1 11.22,32.53 11.22,32.21 IC9.C1 11.22,32.15 11.54,32.15 IC9.C2 11.6,32.15 11.98,32.15 IC9.C3 12.04,32.15 15.41,32.15 15.98,31.58 15.98,28.97
  Top 0.127: 6.3,30.91 6.27,30.88 6.27,30.62 C19.2 | IC3.9 6.71,28.84 IC3.8 6.77,28.91 6.9,29.03 6.9,29.1 7.03,29.23 10.01,29.23 10.27,28.97 11.35,28.97 C25.2 11.41,28.97 12.17,28.97 C33.2 12.23,28.97 15.98,28.97 | v5.19,28.46 4.11,28.46 R3.1
  Bottom 0.127: v28.3,3.13 v28.3,5.16 v29.51,5.16 | v32.62,16.65 32.62,18.37 32.43,18.56 U1.P$89 32.62,18.43 33.44,18.43 33.57,18.56 U1.P$90 33.63,18.56 34.27,19.19 v35.54,19.19 | v5.19,28.46 16.93,28.46 18.01,29.54 J4.SH4
  pour Top: -4.11,-5.67 53.83,-5.67 54.28,-5.22 54.28,34.72 51.33,37.67 -5.06,37.67 -5.06,-4.72
  pour Bottom: -8.56,-8.67 56.83,-8.67 57.78,-7.72 57.78,35.72 54.33,39.17 -8.56,39.17
HAPTIC_EN
  Top 0.127: U1.P$U1 28.49,19.19 28.24,19.19 28.11,19.32 27.16,19.32 26.97,19.13 26.97,15.64 27.98,14.62 27.98,11.32 30.9,8.4 30.9,7.38 28.81,5.29 28.81,4.72 IC2.A1
IMU_INT1
  Top 0.127: U1.P$N1 28.49,20.15 21.5,20.15 14.08,27.58 7.6,27.58 7.35,27.83 IC3.5
IMU_INT2  (1 unrouted)
LX1
  Top 0.127: IC9.B2 11.6,32.59 11.98,32.59 IC9.B3 12.04,32.59 14.33,32.59 14.65,32.91 L7.1
LX2
  Top 0.127: IC9.D2 11.6,31.77 IC9.D3 12.04,31.7 13.88,31.7 14.65,30.94 L7.2
MOSI  (1 unrouted)
N$1
  Top 0.127: IC1.D1 30.9,31 32.62,31 R9.2
N$2
  Top 0.127: IC3.1 5.76,27.32 4.68,27.32 4.11,27.89 R3.2
N$3
  Top 0.127: U1.P$A18 33.06,23.7 33.06,24.02 33.38,24.34 C13.1
N$4
  Top 0.127: IC9.D1 11.15,31.77 10.08,31.77 9.63,32.21 R4.2
N$5
  Top 0.127: IC9.E1 11.15,31.38 9.88,31.38 9.63,31.64 R2.2
N$6
  Top 0.127: U1.P$N24 35.09,20.15 35.67,20.15 C9.1
N$7
  Top 0.127: U1.P$AC5 29.76,17.6 29.19,17.6 29.12,17.54 28.3,17.54 27.92,17.16 C20.1
N$8
  Top 0.127: L3.1 31.92,25.54 31.41,25.54 31.03,25.92 L2.2
N$9
  Top 0.127: U1.P$B3 29.32,23.19 29.32,24.08 30.14,24.91 30.97,24.91 L2.1
N$10  (via drill 0.3)
  Top 0.127: v34.59,20.91 34.59,21.35 U1.P$H23 | v36.87,20.91 38.21,20.91 38.52,20.59 C3.1 38.59,20.53 L1.1
  Bottom 0.127: v36.87,20.91 v34.59,20.91
N$11  (via drill 0.3)
  Top 0.127: v36.17,23.13 35.09,23.13 U1.P$B24 | v39.79,23.13 40.37,23.13 40.62,23.38 X1.1 40.43,23.13 41.13,22.43 41.13,22.24 C1.1
  Bottom 0.127: v39.79,23.13 v36.17,23.13
N$12  (via drill 0.3)
  Top 0.127: v36.17,24.02 36.11,23.95 35.03,23.95 34.78,23.7 34.59,23.7 U1.P$A23 | v40.3,26.3 40.75,25.86 40.75,25.73 C2.1 40.81,25.67 41.89,24.59 42.08,24.59 X1.3
  Bottom 0.127: v36.17,24.02 38.02,24.02 v40.3,26.3
N$14
  Top 0.127: C32.2 30.59,4.59 29.19,4.59 28.81,4.21 IC2.A2
N$15
  Top 0.127: EPD_C2.2 12.42,22.37 12.11,22.37 11.54,21.8 10.65,21.8 J1.4
N$16  (via drill 0.3)
  Top 0.127: 8.96,6.52 7.73,7.76 D5.2 | 8.96,6.52 9,6.49 9,6.24 C2-EP-DR.2 | v19.73,18.37 18.2,19.89 18.2,22.37 Q3.3 | v17,7.83 16.17,7 L5.1 | v12.36,6.56 9,6.56 8.96,6.52
  Bottom 0.127: v19.73,18.37 19.73,10.56 v17,7.83 15.73,6.56 v12.36,6.56
N$17  (via drill 0.3)
  Top 0.127: 8.52,5.19 7.6,4.27 D2.1 | 8.52,5.19 9,5.67 C2-EP-DR.1 | v16.49,1.98 19.03,1.98 D4.2 | v8.55,5.16 8.52,5.19
  Bottom 0.127: v16.49,1.98 16.17,1.98 13.95,4.21 9.5,4.21 v8.55,5.16
N$18
  Top 0.127: R1_EP_DR.1 14.65,21.92 14.65,21.41 R_TYPE_SEL.2 14.58,21.35 14.58,20.27 SJ1.2
N$19
  Top 0.127: EPD_C1.2 12.36,21.54 11.22,21.54 10.96,21.29 10.65,21.29 J1.5
N$20
  Top 0.127: R2_USB.1 20.62,27.96 20.62,28.97 J4.B5
N$21
  Top 0.127: EPD_C6.2 12.36,14.68 10.65,14.68 J1.18
N$22
  Top 0.127: EPD_C7.2 12.36,13.8 11.41,13.8 10.96,14.24 10.65,14.24 J1.19
N$23
  Top 0.127: EPD_C8.2 12.36,12.97 11.73,12.97 10.96,13.73 10.65,13.73 J1.20
N$25
  Top 0.127: EPD_C10.2 12.42,11.51 12.17,11.51 10.96,12.72 10.65,12.72 J1.22
N$26
  Top 0.127: R1_USB.2 23.66,27.96 23.66,28.97 J4.A5
N$27
  Top 0.127: EPD_C12.2 12.3,10.05 10.65,11.7 J1.24
OUT+
  Top 0.127: IC2.A3 28.81,3.63 28.81,2.75 30.27,1.29 TP_OP.TP
OUT-
  Top 0.127: IC2.C3 27.79,3.63 27.79,2.24 26.84,1.29 TP_ON.TP
P0.00/XL1
  Top 0.127: U1.P$D2 29,22.37 28.74,22.37 28.68,22.3 26.27,22.3 23.86,24.72 X2.2 23.79,24.78 23.41,25.16 22.33,25.16 C17.2
P0.01/XL2
  Top 0.127: U1.P$F2 29,21.92 28.68,21.92 28.55,22.05 24.11,22.05 23.92,22.24 X2.1 23.86,22.24 23.35,21.73 22.33,21.73 C18.2
P0.13  (via drill 0.3)
  Top 0.127: R1.1 9.88,4.08 10.58,4.08 10.65,4.14 SW_UP.2 10.71,4.21 10.71,4.78 v11.09,5.16 11.73,5.16 11.92,5.35 C30.2 | v29.32,15.57 30.52,16.78 30.52,17.1 U1.P$AD8
  Bottom 0.127: v29.32,15.57 26.01,15.57 15.6,5.16 v11.09,5.16
P0.14  (via drill 0.3)
  Top 0.127: v30.33,17.6 30.78,17.6 U1.P$AC9 | v37.38,18.3 37.38,18.05 37.32,17.99 37.32,16.72 v37.38,16.65 | v22.33,3.44 21.63,4.14 SW_ENT.2 | C31.2 22.46,5.41 21.63,4.59 21.63,4.21 SW_ENT.2 | R8.1 20.74,4.02 21.44,4.02 21.57,4.14 SW_ENT.2
  Bottom 0.127: v30.33,17.6 31.09,17.6 31.79,18.3 31.79,18.88 32.11,19.19 33.89,19.19 34.33,19.64 36.05,19.64 v37.38,18.3 | v37.38,16.65 36.62,16.65 33.7,13.73 33.7,10.05 34.78,8.97 34.78,8.59 28.87,2.68 26.33,2.68 25.38,3.63 22.52,3.63 v22.33,3.44
P1.01  (via drill 0.3)
  Top 0.127: v34.52,17.67 34.52,18.37 U1.P$Y23 | v33.51,16.65 33.51,16.15 v31.92,14.56 | v24.93,13.22 21.44,9.73 20.93,9.73 20.81,9.6 20.81,7.89 21.44,7.26 Q1.1 21.5,7.26 21.76,7.26 22.39,7.89 R_PWR_EPD.1
  Bottom 0.127: v33.51,16.65 v34.52,17.67 | v31.92,14.56 29.63,14.56 28.3,13.22 v24.93,13.22
P1.02
  Top 0.127: R7.1 31.79,3.95 32.3,3.95 32.55,4.21 SW_DN.2 32.62,4.27 32.62,4.52 33.57,5.48 33.83,5.48 C29.2 33.89,5.48 33.89,8.97 36.68,11.76 36.68,17.03 35.09,18.62 U1.P$W24
PMIC_INT  (1 unrouted)
PREVGH
  Top 0.127: EPD_C9.2 12.36,12.27 11.92,12.27 10.96,13.22 10.65,13.22 J1.21 10.58,13.22 10.33,13.22 9.82,12.72 9.82,11.83 5.82,7.83 4.17,7.83 D5.1
PREVGL
  Top 0.127: EPD_C11.2 12.36,10.75 11.22,11.89 11.22,11.95 10.96,12.21 10.65,12.21 J1.23 10.58,12.21 10.33,12.21 10.08,11.95 10.08,11.7 4.17,5.79 4.17,4.27 D2.2
RESE
  Top 0.127: Q3.2 16.04,21.8 15.92,21.92 15.16,21.92 R1_EP_DR.2 15.16,21.99 14.33,22.81 12.17,22.81 11.66,22.3 10.65,22.3 J1.3
RESET  (via drill 0.3)  (1 unrouted)
  Top 0.127: v38.59,10.87 38.97,10.49 39.22,10.49 J2.6 | v34.14,10.94 32.94,10.94 32.81,10.81 TP_RESET.TP
  Bottom 0.127: v38.59,10.87 38.21,10.87 38.14,10.94 v34.14,10.94
RF
  Top 0.127: L1.2 40.49,20.53 41.38,20.53 C4.1 41.44,20.53 C22.1 42.33,20.59 43.98,20.59 44.43,21.03 ANT1.1
SCK  (via drill 0.3)
  Top 0.127: v30.2,23.95 31.16,23.95 31.41,23.7 31.54,23.7 U1.P$A12 | v11.41,17.67 11.03,17.29 10.65,17.29 J1.13
  Bottom 0.127: v30.2,23.95 24.68,23.95 18.39,17.67 v11.41,17.67
SCL  (via drill 0.3)  (1 unrouted)
  Top 0.127: v26.9,4.72 27.79,4.72 IC2.C1 | v27.66,7.19 28.62,8.14 TP_SCL.TP | R17.2 29.89,8.21 28.68,8.21 TP_SCL.TP | 23.86,15.26 24.49,15.26 27.73,12.02 27.73,9.22 28.68,8.27 TP_SCL.TP | 23.86,15.26 23.28,15.26 U3.7 | v16.11,32.08 21.7,32.08 22.39,31.38 26.9,31.38 27.66,30.62 29.76,30.62 30.01,30.88 30.01,30.94 IC1.B1 | v8.49,32.08 8.87,32.08 9,32.21 R4.1 | v5.19,27.83 5.69,27.83 IC3.12 | 23.86,15.26 23.86,16.53 22.97,17.41 17.89,17.41 16.68,18.62 v16.68,21.1
  Bottom 0.127: v26.9,4.72 26.9,6.43 v27.66,7.19 | v5.19,27.83 4.74,28.27 4.74,28.65 5.57,29.48 7.09,29.48 8.49,30.88 v8.49,32.08 v16.11,32.08 17.19,32.08 18.84,30.43 18.84,29.92 18.9,29.86 18.9,28.78 16.68,26.56 v16.68,21.1
SDA  (via drill 0.3)  (1 unrouted)
  Top 0.127: 5.98,26.91 5.95,26.88 4.55,26.88 3.73,27.7 3.73,28.91 4.36,29.54 5.88,29.54 7.98,31.64 9,31.64 R2.1 | 5.98,26.91 6.2,27.13 6.2,27.26 IC3.2 | TP_SDA.TP 24.81,8.21 24.93,8.33 26.08,8.33 R18.2 26.08,8.27 26.39,7.95 26.84,7.95 27.03,8.14 27.03,12.08 v24.3,14.81 | v27.41,20.59 28.49,20.59 U1.P$L1 | U3.8 23.28,15.83 v23.28,16.46 23.22,16.53 18.39,16.53 15.54,19.38 v15.54,19.95 | v30.52,30.18 30.52,30.94 IC1.C1 | v9.12,24.46 8.11,24.46 6.01,26.56 6.01,26.88 5.98,26.91
  Bottom 0.127: 26.17,19.35 v23.28,16.46 23.35,16.46 24.3,15.51 v24.3,14.81 | 26.17,19.35 v27.41,20.59 | v30.52,30.18 30.52,24.27 30.65,24.15 30.65,23.7 28.36,21.41 28.36,18.11 28.11,17.86 27.66,17.86 26.2,19.32 26.17,19.35 | v9.12,24.46 13.63,19.95 v15.54,19.95
SWDCLK  (via drill 0.3)
  Top 0.127: v36.24,12.72 36.43,12.91 36.43,16.78 35.09,18.11 U1.P$AA24 | v39.92,11 40.49,10.43 J2.4 40.49,10.37 41.38,9.48 41.38,7.95 38.97,5.54 38.97,1.86 TP_SWDCLK.TP
  Bottom 0.127: v36.24,12.72 37.63,11.32 39.6,11.32 v39.92,11
SWDIO  (via drill 0.3)
  Top 0.127: v35.98,15.38 35.98,16.84 35.22,17.6 35.09,17.6 U1.P$AC24 | v41.19,11.06 41.76,10.49 J2.2 41.83,10.43 41.95,10.3 43.48,10.3 44.56,9.22 44.56,7.95 41.51,4.91 41.51,3.83 TP_SWDIO.TP
  Bottom 0.127: v35.98,15.38 39.92,11.45 40.81,11.45 v41.19,11.06
SWO
  Top 0.127: U1.P$AD22 34.02,17.1 34.02,14.68 32.81,13.48 TP_SWO.TP
VBAT  (via drill 0.3)
  Top 0.127: 30.52,32.08 30.52,32.53 31.41,33.42 C37.2 | 30.52,32.08 30.52,31.38 IC1.C2 | U3.3 21.31,15.26 U3.2 21.25,15.32 21,15.32 20.68,15.64 20.23,15.64 C27.2 20.17,15.64 20.04,15.64 18.14,13.73 TP_VBAT.TP 18.08,13.73 16.87,13.73 12.11,18.49 v12.11,19.26 | v25.38,32.08 30.52,32.08
  Bottom 0.127: v25.38,32.08 21.95,32.08 20.17,30.3 20.17,23.95 15.47,19.26 v12.11,19.26
VBUS  (via drill 0.3)
  Top 0.3: 28.49,16.59 29,17.1 U1.P$AD2 | 28.49,16.59 28.49,15 28.62,14.87 28.62,12.65 29.76,11.51 C21.1 | 38.84,29.99 38.84,29.23 C43.1 | 38.84,29.99 C42.2 | 38.84,29.99 38.97,30.05 39.92,30.05 40.75,30.88 40.75,31.77 40.3,32.21 39.92,32.21 D3.5 39.73,32.34 v38.33,32.34 | v29.19,31.38 29.63,31.38 IC1.A2 | v29.19,32.97 28.81,33.35 C38.2 | v21.82,31.32 20.04,29.54 20.04,29.03 J4.A9_B4 | v24.55,30.37 24.55,29.73 24.74,29.54 24.74,29.03 J4.A4_B9 | v28.3,16.65 28.36,16.65 28.49,16.59 | v25.95,16.65 25.82,16.65 22.71,19.76 21.25,19.76 v20.55,20.46
  Bottom 0.3: 24.55,31.32 29.06,31.32 v29.19,31.38 v29.19,32.97 29.32,33.03 29.95,33.67 32.49,33.67 33.83,32.34 v38.33,32.34 | 24.55,31.32 v21.82,31.32 21.76,31.19 20.55,29.99 v20.55,20.46 | v24.55,30.37 24.55,31.19 24.55,31.32 | v25.95,16.65 v28.3,16.65
VREG
  Top 0.127: 24.97,32.3 25.19,32.53 29.38,32.53 30.14,33.29 C39.1 | 24.97,32.3 24.93,32.27 24.93,31.89 25.19,31.64 25.57,31.64 25.76,31.83 29.76,31.83 30.08,31.51 30.08,31.38 IC1.B2 | TP_VREG.TP 4.17,32.91 4.55,33.29 8.17,33.29 C24.1 8.23,33.35 9.25,33.35 C23.2 9.31,33.29 9.5,33.29 9.82,32.97 11.15,32.97 IC9.A1 11.22,32.97 11.54,32.97 IC9.A2 11.6,32.97 11.98,32.97 IC9.A3 12.04,32.97 12.81,33.73 15.85,33.73 17.25,32.34 24.93,32.34 24.97,32.3